# Altium PCB PCB_Design.PcbDoc
Units mm, origin at the board's own origin, x right, y up, seen from the top; angles counter-clockwise.
Board outline 85 x 95 mm, 2 copper layers (Top Layer, Bottom Layer); 23 components, 30 nets, 122 pads, 18 vias.
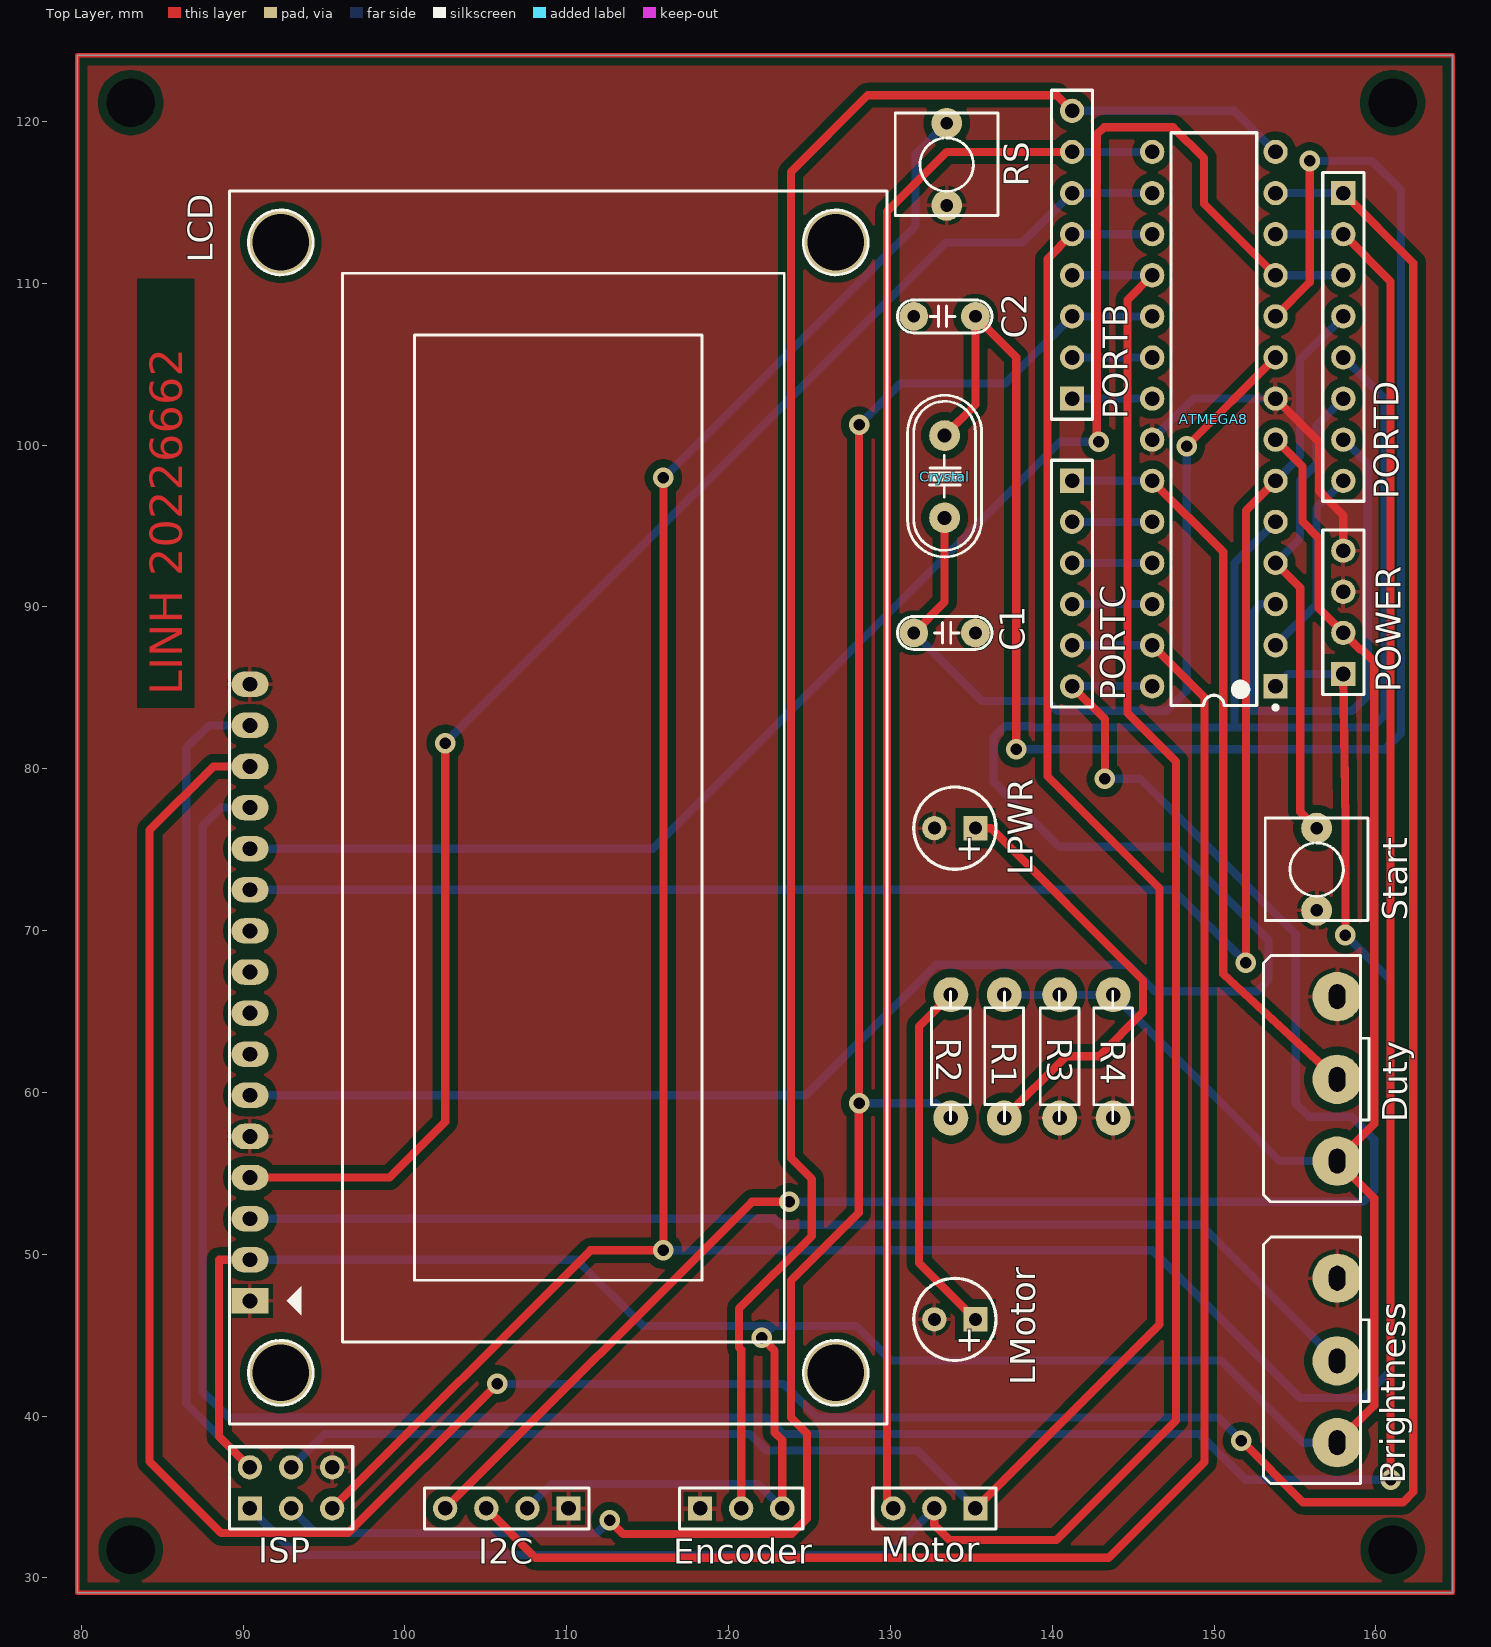
[diagram p0: Top Layer view]
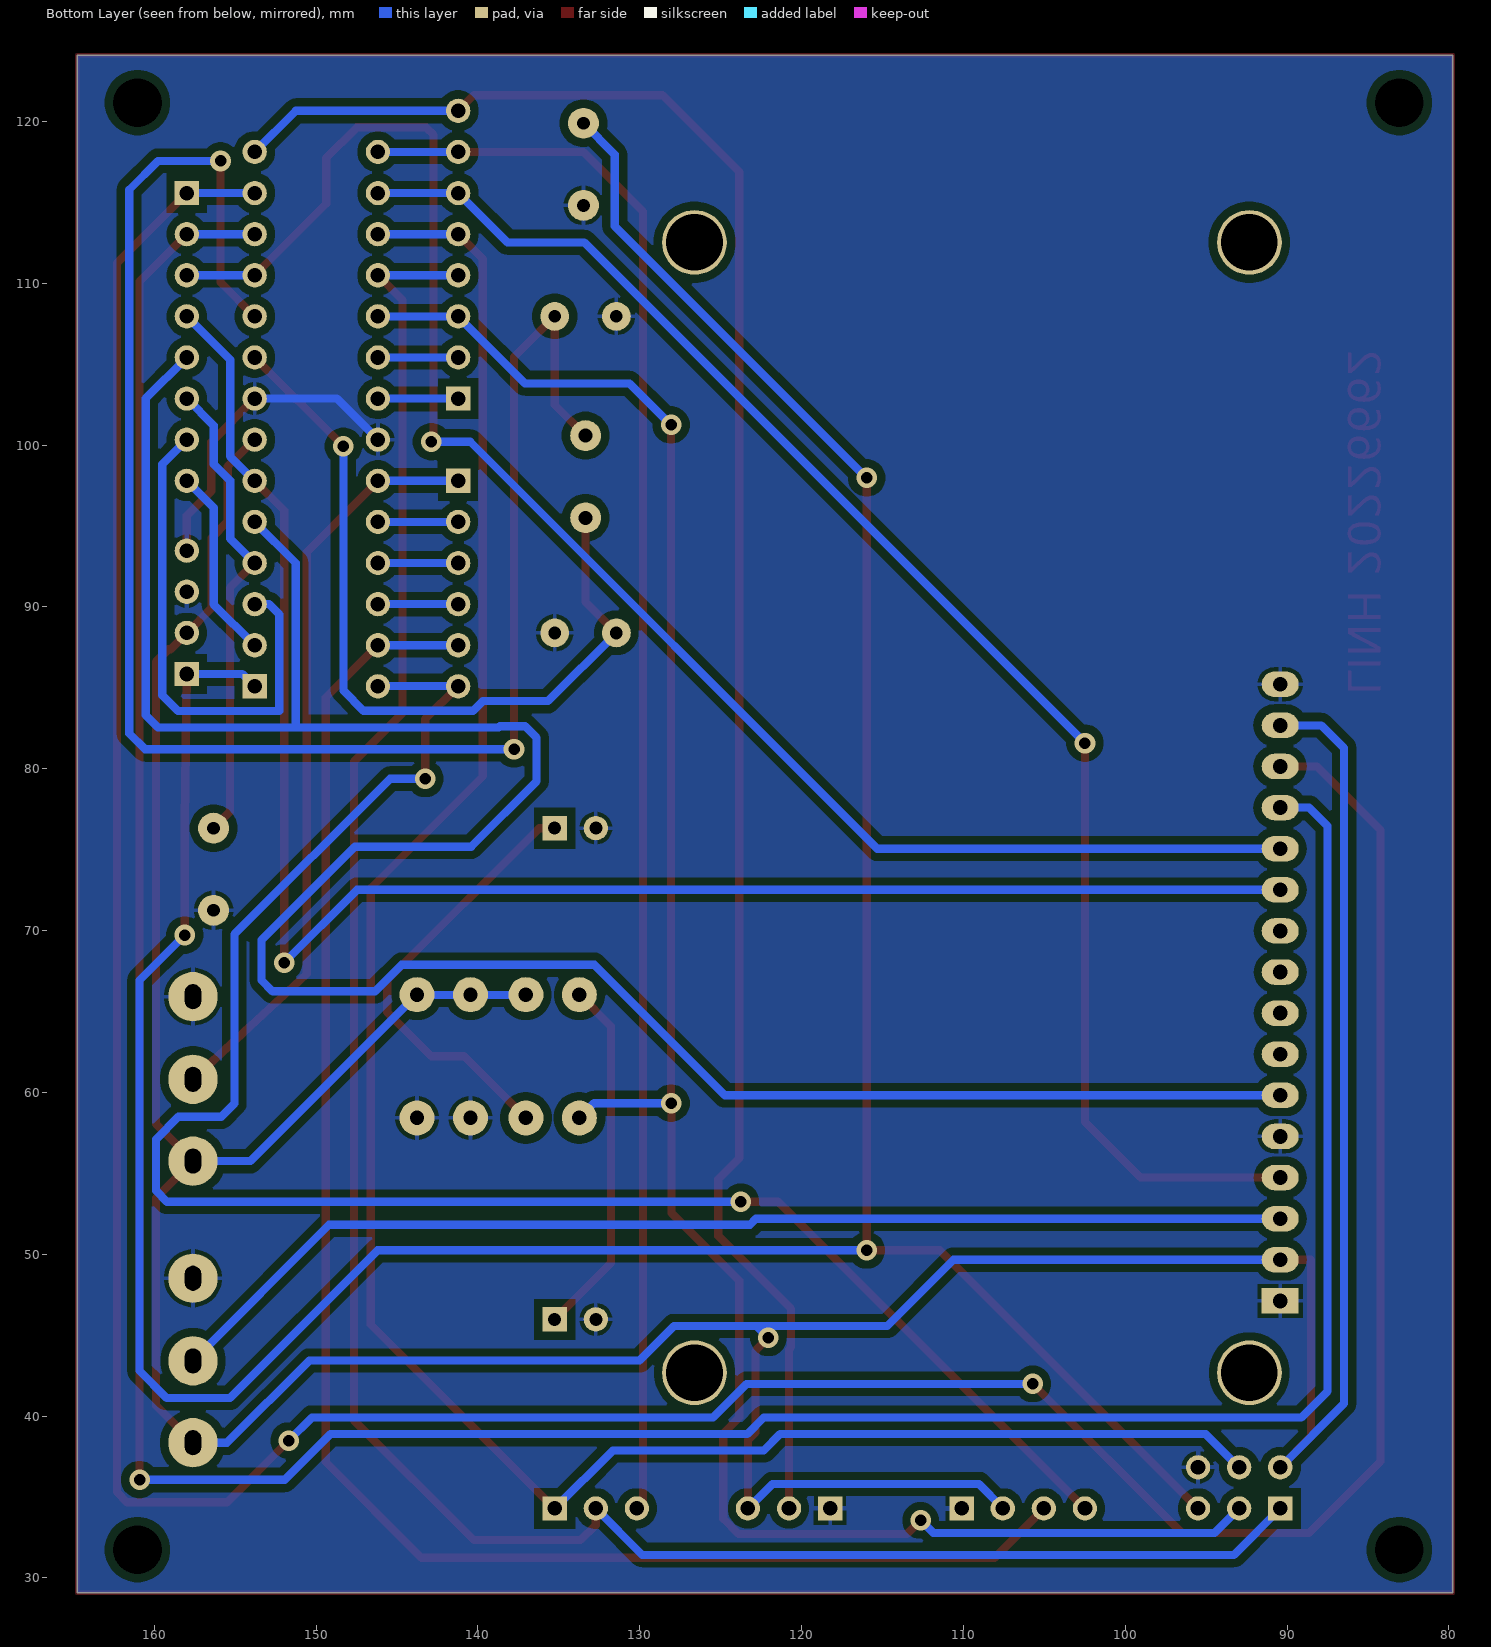
[diagram p1: Bottom Layer view, seen from below]

## Layer stack, top to bottom
Top Solder: solder mask 0.0102, Solder Resist, Dk 3.5
Top Layer: signal copper 0.0356
Dielectric 1: dielectric 0.32, FR-4, Dk 4.8
Bottom Layer: signal copper 0.0356
Bottom Solder: solder mask 0.0102, Solder Resist, Dk 3.5

## Board outline
79.756,29.083 79.756,124.083 164.756,124.083 164.756,29.083

## Design rules (kind name [scope] priority, off if disabled: settings)
Clearance [All] p1: gap=0.508 ignorepadtopadclearanceinfootprint=FALSE
PolygonConnect [All] p1: connectstyle=Relief reliefconductorwidth=0.254 reliefentries=4 polygonreliefangle="90 Angle" airgapwidth=0.254
RoutingVias [All] p1: holewidth=0.711 width=1.27 viastyle="Through Hole" minholewidth=0.711 minwidth=1.27 maxholewidth=0.711 maxwidth=1.27
SolderMaskExpansion [All] p1: expansion=0.102 istentingtop=FALSE
Width [All] p1: maxlimit=1.27 minlimit=0.381 preferedwidth=0.508
30 further rules are at their usual default settings.

## Components (designator, comment, footprint, x,y, rotation, side; value= is the part's Value field where it differs from the comment)
ATMEGA8 "ATmega8A-PU" 28P3 149.987,101.6 r180 top
Brightness "10K" VOL-S 157.607,43.434 r90 top value="Volume 50k" (schematic designator BR)
C1 "22uF" CN1.5 135.255,88.392 r180 top value=0.01uF
C2 "22uF" CN1.5 131.445,107.95 r0 top value=0.01uF
Crystal "16MHz" XT2 133.35,98.044 r270 top value=4Mhz
Duty "10K" VOL-S 157.607,60.833 r90 top value="Volume 50k"
Encoder "" HDR1X3 118.237,34.29 r0 top
I2C "" HDR1X4 110.109,34.29 r180 top
ISP "Header 3X2" HDR2X3 90.424,34.29 r0 top (schematic designator SPI)
LCD "CD16x2A" LCD16X2 90.424,47.117 r90 top value=LCD16x2A
LMotor "LED5" LED5MM 135.255,45.974 r180 top
LPWR "LED5" LED5MM 135.255,76.327 r180 top
Motor "" HDR1X3 135.255,34.29 r180 top
PORTB "Header 8" HDR1X8 141.224,102.87 r90 top
PORTC "" HDR1X6 141.224,97.79 r270 top
PORTD "" HDR1X8 157.988,115.57 r270 top
POWER "Header 4" HDR1X4 157.988,85.852 r90 top
R1 "220" RES-1/4W-SMALL 137.033,61.976 r90 top value="R1/4W - 1K"
R2 "220" RES-1/4W-SMALL 133.731,62.484 r270 top value="R1/4W - 1K"
R3 "12K" RES-1/4W-SMALL 140.462,62.484 r270 top value="R1/4W - 1K"
R4 "12K" RES-1/4W-SMALL 143.764,62.484 r270 top value="R1/4W - 1K"
RS "SW" SW2 133.477,114.808 r90 top value="SW chip 2 pin"
Start "" SW2 156.337,71.247 r90 top value="SW chip 2 pin" (schematic designator Start/Stop)

## Footprints (in the part's own frame and the unit in brackets; to place one, negate y for a bottom-side part, rotate by r counter-clockwise, add the part's x,y. Pads: shape width x height; smd on the part's side, far side on the other; paste and mask are expansions set on the pad)
28P3 [mm] "DIP, 28-Leads, Row Spacing 7.62mm, Pitch 2.54mm, Body 34.67x7.3mm"
  rect 1.5x1.5 hole 0.9: 1(-3.81,16.51)
  round 1.5 hole 0.9: 2(-3.81,13.97) 3(-3.81,11.43) 4(-3.81,8.89) 5(-3.81,6.35) 6(-3.81,3.81) 7(-3.81,1.27) 8(-3.81,-1.27) 9(-3.81,-3.81) 10(-3.81,-6.35) 11(-3.81,-8.89) 12(-3.81,-11.43) 13(-3.81,-13.97) 14(-3.81,-16.51) 15(3.81,-16.51) 16(3.81,-13.97) 17(3.81,-11.43) 18(3.81,-8.89) 19(3.81,-6.35) 20(3.81,-3.81) 21(3.81,-1.27) 22(3.81,1.27) 23(3.81,3.81) 24(3.81,6.35) 25(3.81,8.89) 26(3.81,11.43) 27(3.81,13.97) 28(3.81,16.51)
  silkscreen extent -3.94,-17.7 2.65,17.93, body extent -3.6,-17.65 3.6,17.65, height 4.58
CN1.5 [mil]
  round 70 hole 31: 1(0,0) 2(150,0)
  silkscreen extent -40,-40 190,40, body extent -40,-33 190,33, height 235
HDR1X3 [mm] "Connector; Header; 3 Position"
  rect 1.5x1.5 hole 0.9: 1(0,0)
  round 1.5 hole 0.9: 2(2.54,0) 3(5.08,0)
  silkscreen extent -1.27,-1.27 6.35,1.27
HDR1X4 [mm] "Connector; Header; 4 Position"
  rect 1.5x1.5 hole 0.9: 1(0,0)
  round 1.5 hole 0.9: 2(2.54,0) 3(5.08,0) 4(7.62,0)
  silkscreen extent -1.27,-1.27 8.89,1.27
HDR1X6 [mm] "Connector; Header; 6 Position"
  rect 1.5x1.5 hole 0.9: 1(0,0)
  round 1.5 hole 0.9: 2(2.54,0) 3(5.08,0) 4(7.62,0) 5(10.16,0) 6(12.7,0)
  silkscreen extent -1.27,-1.27 13.97,1.27
HDR1X8 [mm] "Connector; Header; 8 Position"
  rect 1.5x1.5 hole 0.9: 1(0,0)
  round 1.5 hole 0.9: 2(2.54,0) 3(5.08,0) 4(7.62,0) 5(10.16,0) 6(12.7,0) 7(15.24,0) 8(17.78,0)
  silkscreen extent -1.27,-1.27 19.05,1.27
HDR2X3 [mm] "Connector; Header; 3x2 Position"
  rect 1.5x1.5 hole 0.9: 1(0,0)
  round 1.5 hole 0.9: 2(0,2.54) 3(2.54,0) 4(2.54,2.54) 5(5.08,0) 6(5.08,2.54)
  silkscreen extent -1.27,-1.27 6.35,3.81
LCD16X2 [mil] "LCD dipslay 16x2, 16 pin"
  rect 62x90 hole 36: 1(0,0)
  oval 62x90 hole 36: 2(100,0) 3(200,0) 4(300,0) 5(400,0) 6(500,0) 7(600,0) 8(700,0) 9(800,0) 10(900,0) 11(1000,0) 12(1100,0) 13(1200,0) 14(1300,0) 15(1400,0) 16(1500,0)
  round 157.48 hole 137.8: "Hole 0"(-175,-75) "Hole 0"(-175,-1425) "Hole 0"(2575,-1425) "Hole 0"(2575,-75)
  silkscreen extent -300,-1550 2700,50, body extent -315,-1360 2855,77, height 414
LED5MM [mm]
  rect 1.5x1.5 hole 0.8: 1(0,0)
  round 1.5 hole 0.8: 2(2.54,0)
  silkscreen extent -1.27,-2.54 3.81,2.54
RES-1/4W-SMALL [mil]
  round 85 hole 35: 1(-140,0) 2(160,0)
  silkscreen extent -148,-47 166,47, body extent -152,-47 172,47, height 97
SW2 [mil] "SW button 2pin, 250x 250 mil"
  round 75 hole 31: 1(0,0) 2(200,0)
  silkscreen extent -25,-125 225,125
VOL-S [mil] "Volume control single"
  round 120 hole 40 slot 60 at 0 deg: 1(-200,0) 2(-1,0) 3(200,0)
  silkscreen extent -299,-77 300,179
XT2 [mil] "Footpin for Crystal 2 pin"
  round 75 hole 34: 1(-100,0) 2(100,0)
  silkscreen extent -198,-90 195,90, body extent -233,-93 213,90, height 138

## Part data
ATMEGA8: "8-bit AVR Microcontroller, 8KB Flash, 512 Bytes EEPROM, 1KB SRAM, 28-pin PDIP, Industrial Grade (-40°C to 85°C)", Supplier Part Number 1=ATMEGA8A-PU-ND, ComponentLink1Description="Manufacturer Link", ComponentLink1URL=http://www.atmel.com/products/avr/default.asp?, ComponentLink2Description="ATmega8A Datasheet", ComponentLink2URL=http://www.atmel.com/dyn/resources/prod_documents/doc8159.pdf, ComponentLink3Description="ATmega8A Summary", ComponentLink3URL=http://www.atmel.com/dyn/resources/prod_documents/8159S.pdf, ComponentLink4Description="Atmel.com Home", ComponentLink4URL=http://www.atmel.com, DatasheetVersion="revC, Jul-2009", PackageDescription="28-lead (0.300\"/7.62mm Wide) Plastic Dual Inline Package (PDIP)", PackageReference=28P3, PackageVersion="revB, Sep-2001", Published=1-Apr-2010, Publisher="Altium Limited", Supplier 1=Digi-Key, Supplier 2=Farnell, Supplier 3=Mouser, Supplier Part Number 2=1748534, Supplier Part Number 3=556-ATMEGA8A-PU
Brightness Duty: library part VOL-S, "Var Resistor"
C1 C2: library part CN1.5, "Cap np 682pF => 104pF"
Crystal: library part XT2, "Crystal For all Crystal 2pin."
Encoder Motor: library part "Header 3", "Header, 3-Pin", LatestRevisionDate=17-Jul-2002, LatestRevisionNote="Re-released for DXP Platform.", Publisher="Altium Limited"
I2C: library part "Header 4", "Header, 4-Pin", LatestRevisionDate=17-Jul-2002, LatestRevisionNote="Re-released for DXP Platform.", Publisher="Altium Limited"
ISP: "Header, 3-Pin, Dual row", LatestRevisionDate=17-Jul-2002, LatestRevisionNote="Re-released for DXP Platform.", Publisher="Altium Limited"
LCD: library part LCD16x2, "LCD dipslay 16 char, 2 line"
LMotor LPWR: library part "LED 5mm", "LED 5mm"
PORTB: "Header, 8-Pin", LatestRevisionDate=17-Jul-2002, LatestRevisionNote="Re-released for DXP Platform.", Publisher="Altium Limited"
PORTC: library part "Header 6", "Header, 6-Pin", LatestRevisionDate=17-Jul-2002, LatestRevisionNote="Re-released for DXP Platform.", Publisher="Altium Limited"
PORTD: library part "Header 8", "Header, 8-Pin", LatestRevisionDate=17-Jul-2002, LatestRevisionNote="Re-released for DXP Platform.", Publisher="Altium Limited"
POWER: "Header, 4-Pin", LatestRevisionDate=17-Jul-2002, LatestRevisionNote="Re-released for DXP Platform.", Publisher="Altium Limited"
R1 R2 R3 R4: library part "RES 1/4W", "Resistor 1/4W"
RS Start: library part SW2, "Switch button 2 pin"

## Free pads (board coordinates)
  round 1.524 hole 3: 2(83.058,31.75) 2(83.058,121.158) 2(161.036,31.75) 2(161.036,121.158)

## Via types
v1: diameter 1.27, hole 0.711, Top Layer to Bottom Layer, 18 vias

## Nets (pads, with @x,y where several pads share a name; then routed paths per layer and width w, separated by ;. In a path a pad name is that pad's centre, name@x,y a point inside that pad or via, vN(x,y) a via of type N, cw(c..) or ccw(c..) an arc to the next point about the centre after c; other vN are vias at no path point)
AREF: ATMEGA8.21 PORTB.1 | length 5
  Bottom Layer w0.508: PORTB.1 ATMEGA8.21
AVCC: ATMEGA8.20 PORTB.2 | length 5
  Bottom Layer w0.508: PORTB.2 ATMEGA8.20
GND: ATMEGA8.8 ATMEGA8.22 Brightness.3 C1.1 C2.1 Duty.3 Encoder.1 I2C.1 ISP.6 LCD.1 LCD.5 LCD.16 LMotor.2 LPWR.2 POWER.3 POWER.4 R3.2 R4.2 RS.1 Start.1 | length 19.8
  Top Layer w0.508: ATMEGA8.8 156.476,100.191 156.476,97.155 157.988,95.643 POWER.4
  Bottom Layer w0.508: ATMEGA8.22 148.717,102.87 ATMEGA8.8
NetBrightness_2: Brightness.2 LCD.3 | length 70.8
  Bottom Layer w0.508: LCD.3 122.809,52.197 123.186,51.82 149.196,51.82 Brightness.2
NetLMotor_1: LMotor.1 R2.1 | length 22.3
  Top Layer w0.508: R2.1 131.775,64.084 131.775,49.454 LMotor.1
NetLPWR_1: LPWR.1 R1.1 | length 27.5
  Top Layer w0.508: LPWR.1 136.207,76.327 145.606,66.929 145.606,64.96 142.875,62.23 140.843,62.23 R1.1
PB0: ATMEGA8.14 Encoder.2 PORTB.8 | length 118.4
  Top Layer w0.508: Encoder.2 120.777,44.12 120.65,44.247 120.65,46.634 125.146,51.13 125.146,54.635 123.85,55.931 123.85,116.865 128.6,121.615 140.259,121.615 PORTB.8
  Bottom Layer w0.508: PORTB.8 151.257,120.65 ATMEGA8.14
PB1: ATMEGA8.15 Motor.3 PORTB.7 | length 98.4
  Top Layer w0.508: Motor.3 129.794,34.29 129.794,114.427 133.477,118.11 PORTB.7
  Bottom Layer w0.508: PORTB.7 ATMEGA8.15
PB2: ATMEGA8.16 LCD.4 PORTB.6 | length 94.7
  Top Layer w0.508: LCD.4 99.06,54.737 102.489,58.166 v1(102.489,81.585)
  Bottom Layer w0.508: v1(102.489,81.585) 133.426,112.522 138.176,112.522 PORTB.6 ATMEGA8.16
PB3/MOSI: ATMEGA8.17 ISP.4 Motor.1 PORTB.5 | length 137
  Top Layer w0.508: Motor.1 146.621,45.657 146.621,72.612 139.7,79.533 139.7,111.506 PORTB.5
  Bottom Layer w0.508: ISP.4 95.028,38.894 121.323,38.894 122.339,37.878 131.667,37.878 Motor.1 ; PORTB.5 ATMEGA8.17
PB4/MISO: ATMEGA8.18 ISP.1 Motor.2 PORTB.4 | length 141.7
  Top Layer w0.508: Motor.2 132.715,33.274 133.655,32.334 140.259,32.334 147.65,39.726 147.65,80.442 144.653,83.439 144.653,108.966 ATMEGA8.18
  Bottom Layer w0.508: ISP.1 93.294,31.42 129.845,31.42 Motor.2 ; PORTB.4 ATMEGA8.18
PB5/SCK: ATMEGA8.19 ISP.3 PORTB.3 R2.2 | length 130.2
  Top Layer w0.508: v1(112.649,33.553) 113.487,32.715 123.901,32.715 124.841,33.655 124.841,38.919 123.857,39.903 123.857,48.368 128.041,52.553 v1@128.041,59.309 ; v1(128.067,59.334) v1(128.067,101.244)
  Bottom Layer w0.508: ISP.3 94.488,32.766 111.862,32.766 v1(112.649,33.553) ; v1@128.041,59.309 v1(128.067,59.334) 132.817,59.334 R2.2 ; v1(128.067,101.244) 130.632,103.81 137.084,103.81 PORTB.3 ATMEGA8.19
PC0: ATMEGA8.23 Duty.2 PORTC.1 | length 46.8
  Top Layer w0.508: ATMEGA8.23 150.571,93.396 150.571,67.31 Duty.2
  Bottom Layer w0.508: PORTC.1 ATMEGA8.23
PC1: ATMEGA8.24 PORTC.2 | length 5
  Bottom Layer w0.508: PORTC.2 ATMEGA8.24
PC2: ATMEGA8.25 PORTC.3 | length 5
  Bottom Layer w0.508: PORTC.3 ATMEGA8.25
PC3: ATMEGA8.26 PORTC.4 | length 5
  Bottom Layer w0.508: PORTC.4 ATMEGA8.26
PC4/SDA: ATMEGA8.27 I2C.3 PORTC.5 | length 104.8
  Top Layer w0.508: I2C.3 108.077,31.242 143.485,31.242 149.403,37.16 149.403,84.404 ATMEGA8.27
  Bottom Layer w0.508: PORTC.5 ATMEGA8.27
PC5/SCL: ATMEGA8.28 I2C.4 PORTC.6 | length 112.2
  Top Layer w0.508: I2C.4 121.437,53.238 v1(123.749,53.238) ; PORTC.6 143.256,83.058 v1(143.256,79.375)
  Bottom Layer w0.508: v1(123.749,53.238) 159.207,53.238 159.893,53.924 159.893,57.099 158.496,58.496 155.854,58.496 155.042,59.309 155.042,69.774 145.44,79.375 v1(143.256,79.375) ; PORTC.6 141.249,85.115 146.152,85.115 ATMEGA8.28
PD0/RXD: ATMEGA8.2 PORTD.8 | length 11.9
  Bottom Layer w0.508: ATMEGA8.2 156.325,90.158 156.325,96.127 PORTD.8
PD1/TXD: ATMEGA8.3 PORTD.7 | length 31.8
  Bottom Layer w0.508: ATMEGA8.3 152.908,90.17 152.273,89.535 152.273,83.566 158.529,83.566 159.5,84.537 159.5,98.818 PORTD.7
PD2/INT0: ATMEGA8.4 PORTD.6 Start.2 | length 29.3
  Top Layer w0.508: ATMEGA8.4 155.321,91.186 155.321,77.343 Start.2
  Bottom Layer w0.508: ATMEGA8.4 155.309,94.222 155.309,97.802 156.325,98.818 156.325,101.207 PORTD.6
PD3/INT1: ATMEGA8.5 LCD.6 PORTD.5 | length 155.2
  Bottom Layer w0.508: LCD.6 124.739,59.817 132.804,67.882 144.716,67.882 146.355,66.243 152.679,66.243 153.365,66.929 153.365,69.418 147.599,75.184 140.411,75.184 136.373,79.223 136.373,81.915 137.084,82.626 138.632,82.626 138.708,82.55 151.257,82.55 ; ATMEGA8.5 151.257,92.71 151.257,82.55 ; PORTD.5 160.528,102.87 160.528,83.312 159.766,82.55 151.257,82.55
PD4/XCK/T0: ATMEGA8.6 LCD.11 PORTD.4 | length 105.8
  Top Layer w0.508: v1(151.968,68.021) 151.968,95.961 ATMEGA8.6
  Bottom Layer w0.508: LCD.11 147.472,72.517 v1(151.968,68.021) ; ATMEGA8.6 155.309,99.302 155.309,105.271 PORTD.4
PD5/T1: ATMEGA8.11 LCD.12 PORTD.3 | length 102.8
  Top Layer w0.508: v1(142.875,100.203) 142.748,100.33 142.748,119.177 143.205,119.634 147.472,119.634 149.377,117.729 149.377,114.91 ATMEGA8.11
  Bottom Layer w0.508: LCD.12 115.328,75.057 140.474,100.203 v1(142.875,100.203) ; ATMEGA8.11 PORTD.3
PD6: ATMEGA8.12 LCD.13 PORTD.2 | length 196.4
  Top Layer w0.508: PORTD.2 160.909,110.109 v1(160.909,36.068)
  Bottom Layer w0.508: LCD.13 88.646,77.597 87.503,76.454 87.503,41.529 89.122,39.91 122.339,39.91 123.355,38.894 149.104,38.894 151.93,36.068 v1(160.909,36.068) ; ATMEGA8.12 PORTD.2
PD7: ATMEGA8.13 LCD.14 PORTD.1 | length 220.1
  Top Layer w0.508: LCD.14 88.163,80.137 84.226,76.2 84.226,37.186 88.646,32.766 96.496,32.766 v1(105.716,41.986) ; v1(151.689,38.481) 155.499,34.671 161.671,34.671 162.306,35.306 162.306,111.252 PORTD.1
  Bottom Layer w0.508: v1(105.716,41.986) 123.399,41.986 125.475,39.91 150.26,39.91 v1(151.689,38.481) ; ATMEGA8.13 PORTD.1
RESET: ATMEGA8.1 ISP.5 POWER.1 RS.2 | length 202.1
  Top Layer w0.508: ISP.5 111.455,50.241 v1(115.976,50.241) v1(115.976,97.968) ; POWER.1 158.115,76.683 v1(158.115,69.723)
  Bottom Layer w0.508: v1(115.976,50.241) 146.202,50.241 155.321,41.123 159.233,41.123 160.909,42.799 160.909,66.929 v1(158.115,69.723) ; v1(115.976,97.968) 131.547,113.538 131.547,117.958 RS.2 ; ATMEGA8.1 154.559,85.852 POWER.1
VCC: ATMEGA8.7 Brightness.1 Duty.1 Encoder.3 I2C.2 ISP.2 LCD.2 LCD.15 POWER.2 R1.2 R3.1 R4.1 | length 259.4
  Top Layer w0.508: ISP.2 88.519,38.735 88.519,49.657 LCD.2 ; v1(122.047,44.831) 122.841,44.037 122.841,38.989 123.317,38.513 Encoder.3 ; ATMEGA8.7 155.46,98.667 155.46,95.262 156.464,94.258 156.464,89.916 POWER.2 159.004,87.376 159.131,87.376 159.893,86.614 159.893,58.039 Duty.1 159.893,53.467 159.893,40.64 Brightness.1
  Bottom Layer w0.508: ISP.2 86.487,40.767 86.487,81.28 87.884,82.677 LCD.15 ; LCD.2 110.617,49.657 114.706,45.568 122.784,45.568 ; I2C.2 107.569,34.328 109.043,35.802 121.805,35.802 Encoder.3 ; v1(122.047,44.831) 122.784,45.568 ; R1.2 137.058,66.015 140.437,66.015 R3.1 140.487,66.015 143.739,66.015 R4.1 154.051,55.753 Duty.1 ; Brightness.1 155.499,38.354 150.419,43.434 130.023,43.434 127.889,45.568 122.784,45.568
XTAL1: ATMEGA8.9 C1.2 Crystal.2 | length 50.1
  Top Layer w0.508: C1.2 133.35,90.297 Crystal.2 ; v1(148.311,99.924) ATMEGA8.9
  Bottom Layer w0.508: C1.2 135.661,84.176 139.7,84.176 140.298,83.578 147.066,83.578 148.311,84.823 v1(148.311,99.924)
XTAL2: ATMEGA8.10 C2.2 Crystal.1 | length 110.6
  Top Layer w0.508: Crystal.1 135.255,102.489 C2.2 137.77,105.435 v1(137.77,81.204) ; ATMEGA8.10 155.905,110.058 v1(155.905,117.551)
  Bottom Layer w0.508: v1(137.77,81.204) 160.567,81.204 161.544,82.181 161.544,115.773 159.766,117.551 v1(155.905,117.551)
pads on no net: "LCD.Hole 0" LCD.7 LCD.8 LCD.9 LCD.10
copper on no net: | length 360
  Top Layer w0.254: 79.756,29.083 164.756,29.083 164.756,124.083 79.756,124.083 79.756,29.083

## Polygon pours and split planes (outlines as drawn)
GND on Top Layer "GND_L01_P001" (solid, pour order 1): 164.756,29.083 164.756,124.083 79.756,124.083 79.756,29.083
GND on Bottom Layer "GND_L02_P002" (solid, pour order 2): 79.756,29.083 79.756,124.079 164.719,124.079 164.719,29.083

## Other copper
Top Layer:
  text "LINH 20226662" at 86.233,84.532 h2 r90

## Silkscreen, mask and mechanical layers (free items; w line width, h text height)
Mechanical 1:
  the board outline again, w1.2

## Text inside footprints (layer, text, board x,y; h text height)
LMotor: Top Overlay "+" at 135.763,45.339 h1.52 r180
LPWR: Top Overlay "+" at 135.763,75.692 h1.52 r180